# Altium PCB OctopusBotV3R1.PcbDoc
Units mil, origin at the board's own origin, x right, y up, seen from the top; angles counter-clockwise.
Board outline 2109.25 x 3682.09 mil, 2 copper layers (Top Layer, Bottom Layer); 66 components, 69 nets, 273 pads, 70 vias.
Unrouted connection lines stored in the file: 1.
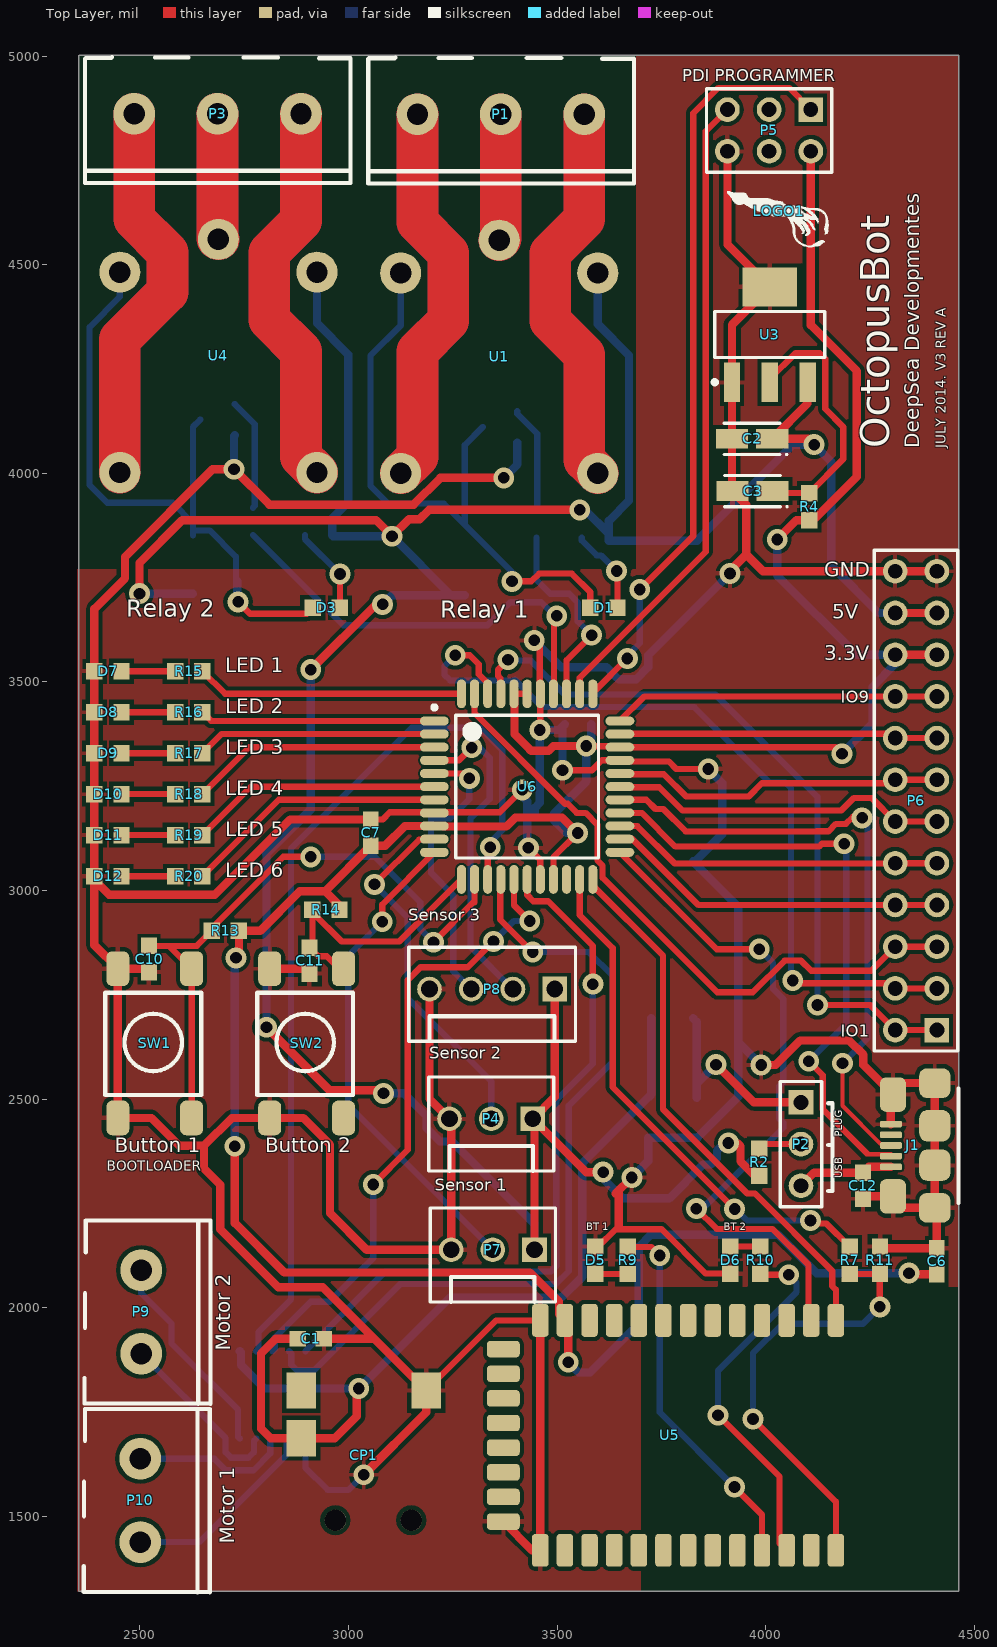
[diagram p0: Top Layer view]
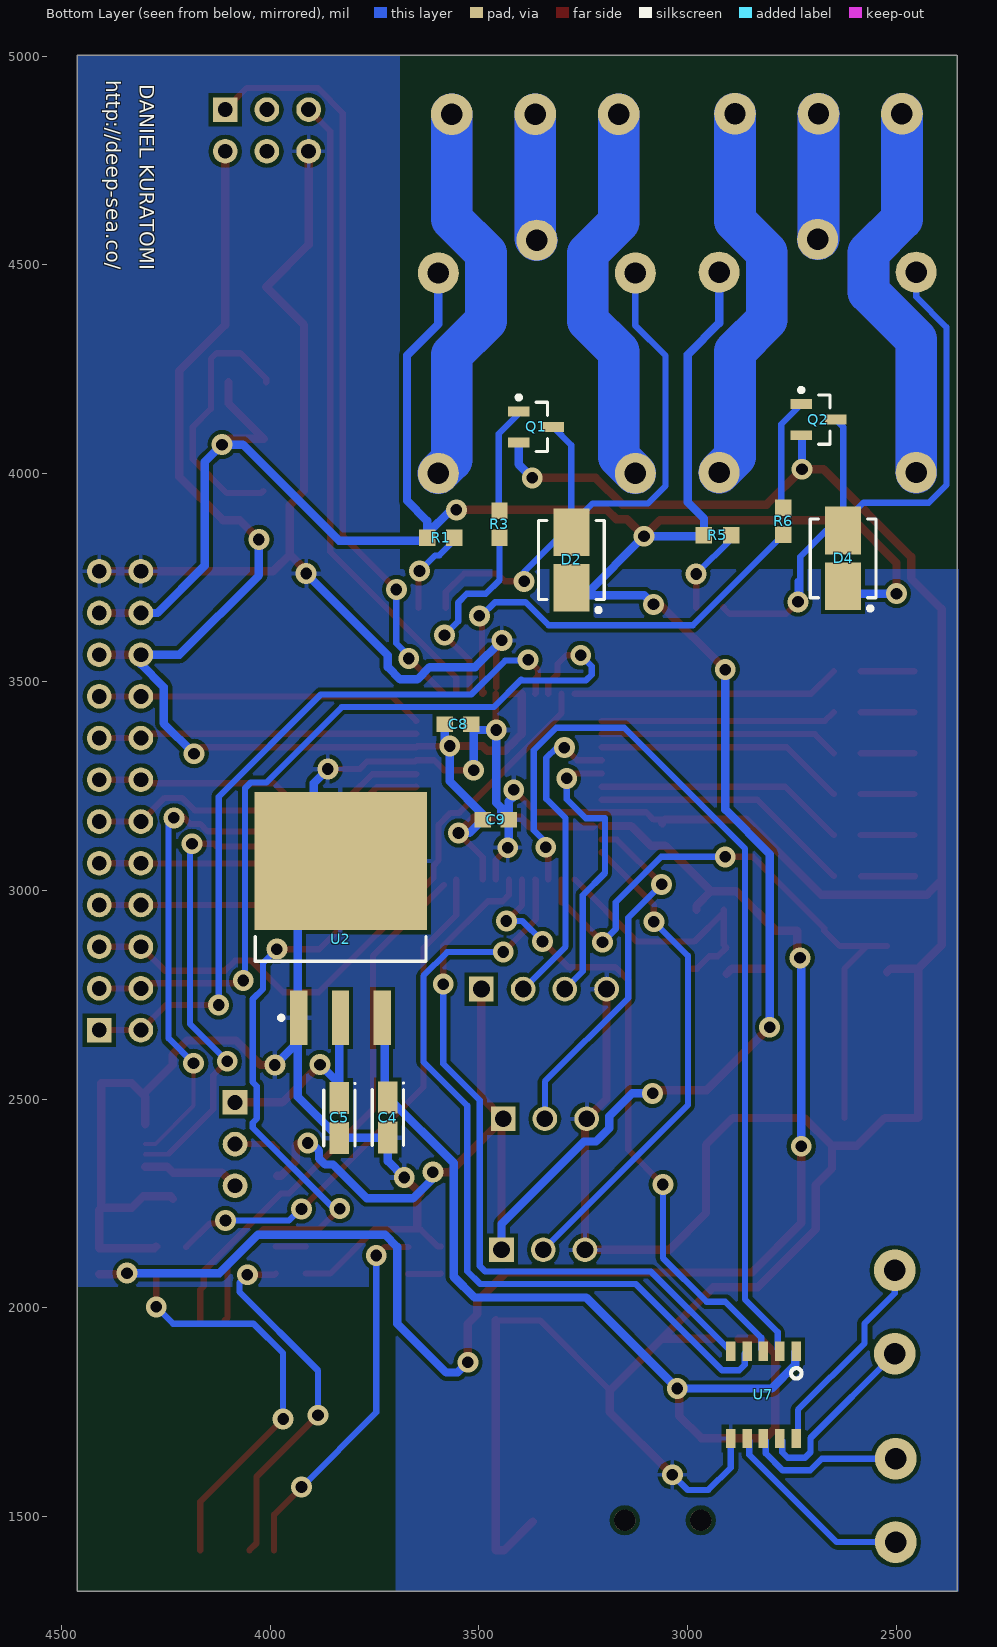
[diagram p1: Bottom Layer view, seen from below]

## Layer stack, top to bottom
Top Layer: signal copper 1.4
Dielectric: dielectric 12.6, FR-4, Dk 4.8
Bottom Layer: signal copper 1.4

## Board outline
2353.35,5000.98 2354.33,5001.97 4462.6,5001.97 4462.6,1319.88 2353.35,1319.88 2353.35,5000.98

## Design rules (kind name [scope] priority, off if disabled: settings)
Clearance fine_pitch [(InComponent('J1') OR InComponent('U6'))] p1: gap=5
Clearance [All] p2: gap=10
MinimumSolderMaskSliver [All] p1: minsoldermaskwidth=5
PolygonConnect [All] p1: connectstyle=Relief reliefconductorwidth=10 reliefentries=4 polygonreliefangle="90 Angle" airgapwidth=10
RoutingVias [All] p1: holewidth=28 width=50 viastyle="Through Hole" minholewidth=28 minwidth=50 maxholewidth=28 maxwidth=50
SilkToSilkClearance [All] p1: silktosilkclearance=2
SilkToSolderMaskClearance Fine [(InComponent('J1') OR InComponent('U6')) vs (InComponent('J1') OR InComponent('U6'))] p1: minsilkscreentomaskgap=1 clearancetoexposedcopper=TRUE
SilkToSolderMaskClearance [IsPad] p2: minsilkscreentomaskgap=5 clearancetoexposedcopper=TRUE
SolderMaskExpansion SolderMaskExpansion_1 [IsVia] p1: expansion=-25
SolderMaskExpansion [All] p2: expansion=4
Width Relays [(InNet('NO_CLOSE_1') OR InNet('NO_CLOSE_2') OR InNet('NO_OPEN_1') OR InNet('NO_OPEN_2') OR InNet('COM_REL_1') OR InNet('COM_REL_2'))] p1: maxlimit=300 minlimit=100 preferedwidth=200
Width Power [(InNet('3V3') OR InNet('5V0') OR InNet('5V0REG') OR InNet('V_POWER') OR InNet('V_USB') OR InNet('GND'))] p2: maxlimit=35 minlimit=15 preferedwidth=20
Width [All] p3: maxlimit=20 minlimit=10 preferedwidth=15
25 further rules are at their usual default settings.

## Components (designator, comment, footprint, x,y, rotation, side; value= is the part's Value field where it differs from the comment)
C1 "0.1uF" C0603_N 2909.45,1925.2 r180 top
C2 "10uF" C_TANT_A_3216_N 3967.52,4082.68 r180 top
C3 "10uF" C_TANT_A_3216_N 3968.5,3957.68 r180 top
C4 "10uF" C_TANT_A_3216_N 3718.5,2455.71 r270 bottom
C5 "10uF" C_TANT_A_3216_N 3834.65,2454.72 r270 bottom
C6 "0.1uF" C0603_N 4410.43,2111.22 r270 top
C7 "0.1uF" C0603_N 3053.15,3138.78 r270 top
C8 "0.1uF" C0603_N 3550.2,3398.62 r0 bottom
C9 "0.1uF" C0603_N 3459.65,3169.29 r0 bottom
C10 "0.1uF" C0603_N 2521.65,2835.63 r270 top
C11 "0.1uF" C0603_N 2906.5,2831.69 r270 top
C12 "0.1uF" C0603_N 4233.27,2292.32 r90 top
CP1 "CONNPOWER" CONNPOWER 3186.02,1801.18 r90 top
D1 "Green" R0603_N 3612.2,3678.15 r180 top
D2 "S1BB-13-F" SMB_M 3278.54,3792.32 r270 bottom
D3 "Green" R0603_N 2946.85,3678.15 r180 top
D4 "S1BB-13-F" SMB_M 2626.97,3796.26 r270 bottom
D5 "Green" R0603_N 3591.54,2114.17 r90 top
D6 "Green" R0603_N 3915.35,2114.17 r270 top
D7 "Green" R0603_N 2423.23,3525.78 r180 top
D8 "Green" R0603_N 2423.23,3427.55 r180 top
D9 "Green" R0603_N 2423.23,3329.33 r180 top
D10 "Green" R0603_N 2423.23,3231.1 r180 top
D11 "Green" R0603_N 2423.23,3132.87 r180 top
D12 "Green" R0603_N 2423.23,3034.65 r180 top
J1 "MICRO_USB" USB_MICRO_SMD 4300.2,2388.78 r90 top
LOGO1 "Logo_DeepSea" DeepSea_logo1 4031.5,4628.94 r90 top
P1 "BLOCK_CONNx3" BLOCK_CONNx3 3365.16,4861.22 r180 top
P2 "Header 3" HDR1X3 4084.65,2492.13 r270 top
P3 "BLOCK_CONNx3" BLOCK_CONNx3 2686.02,4862.2 r180 top
P4 "Conn x 3" "conn x 3" 3441.93,2452.76 r180 top
P5 "Header 3X2" HDR2X3 4108.27,4872.05 r180 top
P6 "Header 12X2" HDR2X12 4410.43,2665.35 r90 top
P7 "Conn x 3" "conn x 3" 3445.87,2138.78 r180 top
P8 "Conn x 4" "conn x 4" 3494.09,2763.78 r180 top
P9 "BLOCK_CONNx2" BLOCK_CONNX2 2502.95,1889.76 r270 top
P10 "BLOCK_CONNx2" BLOCK_CONNX2 2500.98,1437.99 r270 top
Q1 "MMBT3904" SOT23_N 3363.19,4111.22 r180 bottom
Q2 "MMBT3904" SOT23_N 2686.02,4128.94 r180 bottom
R1 "1K" R0603_N 3591.54,3845.47 r0 bottom
R2 "0R" R0603_N 3984.25,2348.43 r270 top
R3 "1K" R0603_N 3450.79,3877.95 r90 bottom
R4 "0R" R0603_N 4104.33,3920.28 r90 top
R5 "1K" R0603_N 2928.15,3851.38 r0 bottom
R6 "1K" R0603_N 2770.67,3884.84 r90 bottom
R7 "1K" R0603_N 4201.77,2113.19 r270 top
R9 "1K" R0603_N 3669.29,2113.19 r270 top
R10 "1K" R0603_N 3987.2,2114.17 r90 top
R11 "10K" R0603_N 4273.95,2114.17 r90 top
R13 "1K" R0603_N 2704.72,2903.54 r0 top
R14 "1K" R0603_N 2945.87,2953.74 r0 top
R15 "1K" R0603_N 2617.13,3525.78 r180 top
R16 "1K" R0603_N 2617.13,3427.55 r180 top
R17 "1K" R0603_N 2617.13,3329.33 r180 top
R18 "1K" R0603_N 2617.13,3231.1 r180 top
R19 "1K" R0603_N 2617.13,3132.87 r180 top
R20 "1K" R0603_N 2617.13,3034.65 r180 top
SW1 "SWITCH" swich_foot 2446.85,2454.72 r90 top
SW2 "SWITCH" swich_foot 2811.02,2454.72 r90 top
U1 "G5LE-1-36 DC5" "Relay 5V" 3125,4000 r270 top
U2 "LM1086ISX-5.0/NOPB" TS3B_N 3831.69,2933.07 r90 bottom
U3 "LM1117MPX-3.3/NOPB" MP04A_N 4009.84,4332.68 r90 top
U4 "G5LE-1-36 DC5" "Relay 5V" 2451.77,4001.97 r270 top
U5 "HC-05" HC-05 3390.75,1693.9 r270 top
U6 "ATXMEGA32A4U-AU" 44A_N 3428.15,3249.02 r0 top
U7 "LV8548MC-AH" SOIC10 2739.17,1895.67 r0 bottom

## Footprints (in the part's own frame and the unit in brackets; to place one, negate y for a bottom-side part, rotate by r counter-clockwise, add the part's x,y. Pads: shape width x height; smd on the part's side, far side on the other; paste and mask are expansions set on the pad)
44A_N [mm] "Thin QFP, 44-Leads, Body 10x10mm, Pitch 0.8mm, IPC Medium Density"
  oval 1.75x0.55 smd: 1(-5.65,4) 2(-5.65,3.2) 3(-5.65,2.4) 4(-5.65,1.6) 5(-5.65,0.8) 6(-5.65,0) 7(-5.65,-0.8) 8(-5.65,-1.6) 9(-5.65,-2.4) 10(-5.65,-3.2) 11(-5.65,-4) 23(5.65,-4) 24(5.65,-3.2) 25(5.65,-2.4) 26(5.65,-1.6) 27(5.65,-0.8) 28(5.65,0) 29(5.65,0.8) 30(5.65,1.6) 31(5.65,2.4) 32(5.65,3.2) 33(5.65,4)
  oval 0.55x1.75 smd: 12(-4,-5.65) 13(-3.2,-5.65) 14(-2.4,-5.65) 15(-1.6,-5.65) 16(-0.8,-5.65) 17(0,-5.65) 18(0.8,-5.65) 19(1.6,-5.65) 20(2.4,-5.65) 21(3.2,-5.65) 22(4,-5.65) 34(4,5.65) 35(3.2,5.65) 36(2.4,5.65) 37(1.6,5.65) 38(0.8,5.65) 39(0,5.65) 40(-0.8,5.65) 41(-1.6,5.65) 42(-2.4,5.65) 43(-3.2,5.65) 44(-4,5.65)
  silkscreen extent -5.77,-4.35 4.35,4.95, body extent -5,-5 5,5, height 1.2
BLOCK_CONNX2 [mm]
  round 2.54 hole 1.3: 1(-5.08,0) 2(0,0)
  silkscreen extent -8.1,-3.45 3.08,4.23, body extent -8.1,-3.45 3.05,4.23, height 10
BLOCK_CONNx3 [mm]
  round 2.54 hole 1.3: 1(-5.08,0) 2(0,0) 3(5.08,0)
  silkscreen extent -8.1,-3.45 8.08,4.23, body extent -8.1,-3.4 8.1,4.2, height 10
C0603_N [mm] "Chip Capacitor, 2-Leads, Body 1,60x0,80mm, IPC Medium Density"
  rect 1x0.95 smd: 1(-0.8,0) 2(0.8,0)
  body extent -0.88,-0.48 0.87,0.48, height 0.85
C_TANT_A_3216_N [mm] "Molded Capacitor, 2-Leads, Body 3,20x1,60mm, IPC Medium Density"
  rect 1.95x1.2 smd: 1(-1.225,0) 2(1.225,0)
  silkscreen extent -2.15,-0.95 1.7,1, body extent -1.7,-0.9 1.7,0.9, height 1.8
"conn x 3" [mm]
  rect 1.5x1.5 hole 1.016: 1(0,0)
  round 1.5 hole 1.016: 2(2.54,0) 3(5.08,0)
  silkscreen extent -1.27,-2.54 6.35,3.18
"conn x 4" [mm]
  rect 1.5x1.5 hole 1.016: 1(0,0)
  round 1.5 hole 1.016: 2(2.54,0) 3(5.08,0) 4(7.62,0)
  silkscreen extent -1.27,-2.54 8.89,3.18
CONNPOWER [mm]
  rect 2.2x1.8 smd: 1(0,0) 2(-2.9,7.6) 3(0,7.6)
  round 1.3 hole 1.3: ""(-7.9,0.9) ""(-7.9,5.525)
  body extent -11.53,-0.8 1.15,7.65, height 6
DeepSea_logo1 [mil]
  silkscreen extent -87,-120 47,123
HC-05 [mm]
  rrect40% 2x1 smd: 1(-7,19.75) 2(-7,18.25) 3(-7,16.75) 4(-7,15.25) 5(-7,13.75) 6(-7,12.25) 7(-7,10.75) 8(-7,9.25) 9(-7,7.75) 10(-7,6.25) 11(-7,4.75) 12(-7,3.25) 13(-7,1.75) 22(7,1.75) 23(7,3.25) 24(7,4.75) 25(7,6.25) 26(7,7.75) 27(7,9.25) 28(7,10.75) 29(7,12.25) 30(7,13.75) 31(7,15.25) 32(7,16.75) 33(7,18.25) 34(7,19.75)
  rrect40% 1x2 smd: 14(-5.25,-0.5) 15(-3.75,-0.5) 16(-2.25,-0.5) 17(-0.75,-0.5) 18(0.75,-0.5) 19(2.25,-0.5) 20(3.75,-0.5) 21(5.25,-0.5)
  body extent -6.42,-0.05 6.58,26.85, height 2.4
HDR1X3 [mm] "Connector; Header; 3 Position"
  rect 1.5x1.5 hole 0.9: 1(0,0)
  round 1.5 hole 0.9: 2(2.54,0) 3(5.08,0)
  silkscreen extent -1.27,-1.27 6.35,1.27
HDR2X3 [mm] "Connector; Header; 3x2 Position"
  rect 1.5x1.5 hole 0.9: 1(0,0)
  round 1.5 hole 0.9: 2(0,2.54) 3(2.54,0) 4(2.54,2.54) 5(5.08,0) 6(5.08,2.54)
  silkscreen extent -1.27,-1.27 6.35,3.81
HDR2X12 [mm] "Connector; Header; 12x2 Position"
  rect 1.5x1.5 hole 0.9: 1(0,0)
  round 1.5 hole 0.9: 2(0,2.54) 3(2.54,0) 4(2.54,2.54) 5(5.08,0) 6(5.08,2.54) 7(7.62,0) 8(7.62,2.54) 9(10.16,0) 10(10.16,2.54) 11(12.7,0) 12(12.7,2.54) 13(15.24,0) 14(15.24,2.54) 15(17.78,0) 16(17.78,2.54) 17(20.32,0) 18(20.32,2.54) 19(22.86,0) 20(22.86,2.54) 21(25.4,0) 22(25.4,2.54) 23(27.94,0) 24(27.94,2.54)
  silkscreen extent -1.27,-1.27 29.21,3.81
MP04A_N [mm] "SOT223, 4-Leads, Body 6.5x3.5mm, Pitch 2.3mm, Lead Span 7mm, IPC Medium Density"
  rect 2.4x1 smd: 1(-2.9,2.3) 2(-2.9,0) 3(-2.9,-2.3)
  rect 2.4x3.3 smd: 4(2.9,0)
  silkscreen extent -3.02,-3.35 1.4,3.47, body extent -1.85,-3.35 1.85,3.35, height 1.8
R0603_N [mm] "Chip Resistor, 2-Leads, Body 1,60x0,85mm, IPC Medium Density"
  rect 1x1 smd: 1(-0.825,0) 2(0.825,0)
  body extent -0.87,-0.48 0.87,0.47, height 0.45
"Relay 5V" [mm]
  round 2.5 hole 1.3: 1(-14.2,6) 2(-12.2,12) 3(0,12) 4(0,0) 5(-12.2,0)
  body extent -16.75,-2.25 5.75,14.25, height 20
SMB_M [mm] "Molded Diode, 2-Leads, Body 4,41x3,62mm, IPC Low Density"
  rect 2.9x2.2 smd: 1(-1.7,0) 2(1.7,0)
  silkscreen extent -2.4,-2 3.17,2, body extent -2.37,-1.97 2.38,1.97, height 2.42
SOIC10 [mm]
  rect 0.58x1.18 smd: 1(0,0) 2(1,0) 3(2,0) 4(3,0) 5(4,0) 6(4,5.32) 7(3,5.32) 8(2,5.32) 9(1,5.32) 10(0,5.32)
  silkscreen extent -0.32,1.03 0.32,1.67, body extent -0.55,0.68 4.45,4.68, height 1.75
SOT23_N [mm] "SOT23, 3-Leads, Body 2.9x1.3mm, Pitch 0.95mm, Lead Span 2.3mm, IPC Medium Density"
  rect 1.3x0.6 smd: 1(-1.05,0.95) 2(-1.05,-0.95) 3(1.05,0)
  silkscreen extent -1.18,-1.5 0.7,1.92, body extent -0.7,-1.5 0.7,1.5, height 1.1
swich_foot [mil]
  rrect50% 83x55 smd: 1(0,0) 1(358,0) 2(0,-177) 2(358,-177)
  silkscreen extent 55,-200 300,30, body extent 57,-201 300,29, height 138
TS3B_N [mm] "D2-PAK, 4-Leads, Body 8.6x10.2mm, Pitch 2.54mm, Lead Span 14.2mm, IPC Medium Density"
  rect 3.3x1.05 smd: 1(-6.05,2.54) 2(-6.05,0) 3(-6.05,-2.54)
  rect 8.4x10.5 smd: 4(3.5,0)
  silkscreen extent -6.17,-5.2 -1.1,5.2, body extent -2.6,-5.2 6.29,5.2, height 4.64
USB_MICRO_SMD [mm]
  rrect50% 0.4x1.35 smd: 1(-1.3,0) 2(-0.65,0) 3(0,0) 4(0.65,0) 5(1.3,0)
  rrect50% 1.8x1.9 smd: shd(-3.8,-2.67) shd(3.8,-2.675)
  rrect50% 2.1x1.6 smd: shd(-3.1,-0.125) shd(3.1,-0.125)
  rrect50% 1.9x1.9 smd: shd(-1.2,-2.675) shd(1.2,-2.675)
  silkscreen extent -3.5,-4.13 3.47,-4.13, body extent -3.96,-5.1 4.01,0.33, height 2.68

## Part data
C1 C6 C7 C8 C9 C10 C11 C12: library part C_SMD
C2 C3 C4 C5: library part CP_SMD
D1 D3 D5 D6 D7 D8 D9 D10 D11 D12: library part LED_SMD
D2 D4: "DIODE GEN PURPOSE 100V 1A SMB"
J1: "CONN USB MICRO B RECPT SMT R/A"
P1 P3: "TERM BLOCK 5.08MM VERT 3POS PCB"
P2: "Header, 3-Pin"
P4 P7: "CONN HEADER VERT 3POS .100 TIN"
P5: "Header, 3-Pin, Dual row"
P6: "Header, 12-Pin, Dual row"
P8: "CONN HEADER VERT 4POS .100 TIN"
P9 P10: "TERM BLOCK 5.08MM VERT 2POS PCB"
Q1 Q2: "NPN Switching Transistor"
R1 R2 R3 R4 R5 R6 R7 R9 R10 R11 R13 R14 R15 R16 R17 R18 R19 R20: library part R_SMD
SW1 SW2: "SWITCH TACTILE SPST-NO 0.05A 12V"
U1 U4: "RELAY GEN PURPOSE SPDT 10A 5V"
U2: "1.5A Low Dropout Positive Regulators, 3-pin TO-263, Pb-Free"
U3: "800mA Low-Dropout Linear Regulator, 4-pin SOT-223, Pb-Free"
U5: "Bluetooth RS232 module"
U6: "IC MCU 8BIT 32KB FLASH 44TQFP"
U7: "IC MOTOR DRIVER PAR MFP10S"

## Via types
v1: diameter 50, hole 28, Top Layer to Bottom Layer, 70 vias

## Nets (pads, with @x,y where several pads share a name; then routed paths per layer and width w, separated by ;. In a path a pad name is that pad's centre, name@x,y a point inside that pad or via, vN(x,y) a via of type N, cw(c..) or ccw(c..) an arc to the next point about the centre after c; other vN are vias at no path point)
3V3: C6.2 C7.2 C8.2 C9.2 P5.2 P6.19 P6.20 R4.1 R13.2 R14.2 U5.12 U6.9 U6.19 U6.31 U6.39 U6.40 | length 7203.6
  Top Layer w15: U6.9@3205.22,3152.03 U6.9@3205.71,3152.52 ; U6.40 3397.66,3471.46 U6.39@3427.15,3471.46 ; U6.19 3491.14,3079.72 v1(3549.21,3137.8) ; v1(3569.88,3346.46) 3570.33,3346 3648.09,3346 U6.31 4167.58,3343.5 v1(4183.07,3328.01)
  Top Layer w20: v1(2727.36,2386.81) 2727.36,2202.76 2845.87,2084.25 3434.68,2084.25 3504.33,2014.6 3504.33,1983.86 U5.12 3526.57,1961.61 v1(3526.57,1869.09) ; v1(2730.32,2838.58) 2737.2,2845.47 R13.2 2788.46,2903.54 2883.35,2998.43 2943.43,2998.43 ; R14.2 2978.35,2963.51 2943.43,2998.43 ; U6.9 3134.84,3154.53 3087.6,3107.28 C7.2 2944.29,2998.43 2943.43,2998.43 ; U6.9@3227.36,3153.54 3378.25,3153.54 3399.9,3175.2 3511.81,3175.2 v1(3549.21,3137.8) ; U6.40@3397.66,3471.46 3397.66,3374.98 3426.18,3346.46 3426.34,3346.46 3437.95,3334.84 3479.37,3334.84 3490.99,3346.46 v1(3569.88,3346.46) ; U6.39@3427.15,3471.46 U6.39 ; v1(4027.56,3841.54) 4073.82,3887.8 R4.1 4114.1,3887.8 4218.52,3992.22 4218.52,4245.08 4108.27,4355.34 P5.2 ; P6.20 P6.19 ; v1(4343.5,2082.68) 4346.46,2079.72 C6.2
  Bottom Layer w20: v1(2727.36,2386.81) 2727.36,2835.63 v1(2730.32,2838.58) ; v1(3526.57,1869.09) 3551.18,1844.49 3578.74,1844.49 3696.06,1961.81 3696.06,2145.71 3725.35,2175 4029.57,2175 4121.89,2082.68 v1(4343.5,2082.68) ; v1(3549.21,3137.8) 3522.64,3137.8 C9.2 3491.14,3182.79 3569.88,3261.53 v1(3569.88,3346.46) 3581.69,3358.27 C8.2 ; v1(4027.56,3841.54) 4027.56,3755.51 4217.72,3565.35 P6.20 4310.43,3542.47 4255.91,3487.94 4255.91,3400.85 v1(4183.07,3328.01)
5V0: C2.1 D2.2 D4.2 P4.1 P6.21 P6.22 P7.1 P8.1 R1.2 R2.2 R5.2 U1.2 U3.3 U4.2 | length 8277
  Top Layer w20: v1(2499.02,3711.61) 2499.02,3785.43 2601.38,3887.8 3065.94,3887.8 v1(3104.33,3849.41) 3144.92,3890 3170.56,3890 3192.97,3912.4 v1(3554.13,3912.4) ; v1(2803.15,2672.24) 2954.17,2521.22 3076.22,2521.22 v1(3083.66,2513.78) ; v1(2909.45,3529.53) 3065.94,3686.02 v1(3081.69,3686.02) ; P7.1 P4.1@3445.87,2448.82 ; P8.1 3494.09,2504.92 P4.1 P4.1@3445.87,2448.82 ; v1(3610.41,2324.92) 3569.77,2324.92 P4.1@3445.87,2448.82 ; v1(3910.43,2394.68) 3932.09,2394.68 3939.57,2387.2 3939.57,2350.86 3974.49,2315.94 R2.2 ; U3.3 4100.39,4167.32 C2.1 4102.36,4082.68 v1(4116.14,4068.9) ; P6.22 P6.21
  Bottom Layer w20: v1(2499.02,3711.61) D4.2@2626.97,3711.61 ; v1(2803.15,2672.24) 2803.15,3085.58 2802.17,3086.56 2909.45,3193.85 v1(2909.45,3529.53) ; U4.2 2924.21,4359.92 2999.21,4284.92 2999.21,3930.51 2960.63,3891.93 R5.2 2962.6,3849.41 v1(3104.33,3849.41) D2.2@3246.06,3707.68 ; v1(3081.69,3686.02) 3103.35,3707.68 D2.2@3246.06,3707.68 ; v1(3083.66,2513.78) 3132.87,2513.78 3187.4,2459.25 3187.4,2430.17 3219.34,2398.23 3248.43,2398.23 3445.87,2200.79 P7.1 ; D2.2@3278.54,3707.68 D2.2@3246.06,3707.68 ; v1(3554.13,3912.4) 3566.85,3912.4 R1.2@3624.02,3855.24 ; U1.2 3597.44,4357.96 3672.44,4282.96 3672.44,3934.45 3624.02,3886.02 3624.02,3838.58 3835.63,3838.58 4065.94,4068.9 v1(4116.14,4068.9) 4157.48,4027.56 4157.48,3778.54 4270.67,3665.35 P6.22 ; v1(3610.41,2324.92) 3610.41,2310.02 3658.42,2262.01 3768.9,2262.01 3850,2343.11 3868.62,2343.11 3883.27,2357.75 3883.27,2376.38 3901.57,2394.68 v1(3910.43,2394.68)
5V0REG: C5.1 P2.1 U2.2 | length 501.3
  Top Layer w20: v1(3880.91,2582.68) 3971.46,2492.13 P2.1
  Bottom Layer w20: U2.2@3825.79,2693.9 3834.65,2685.04 C5.1@3834.65,2536.42 ; C5.1 C5.1@3834.65,2536.42 ; v1(3880.91,2582.68) C5.1@3834.65,2536.42
BRD_1: U6.14 U7.2 | length 2212.4
  Top Layer w15: U6.14 3333.66,3097.38 v1(3339.82,3103.54)
  Bottom Layer w15: U7.2 2784,1901.12 2784,1941.4 2861.95,2019.35 2861.95,3100.38 3151.58,3390.02 3314.95,3390.02 3368.58,3336.39 3368.58,3144.17 3339.82,3115.41 v1(3339.82,3103.54)
BRD_2: U6.16 U7.3 | length 1522.7
  Top Layer w15: v1(3059.06,2295.28) 3142.07,2378.29 3142.07,2785.33 3172.54,2815.81 3285.3,2815.81 v1(3347.44,2877.95) ; U6.16 3396.65,2964.57 v1(3434.31,2926.91)
  Bottom Layer w15: U7.3 2823.37,1901.12 2823.37,1928.22 2909.45,2014.3 2954.26,2014.3 3059.06,2119.09 v1(3059.06,2295.28) ; v1(3347.44,2877.95) 3396.4,2926.91 v1(3434.31,2926.91) v1@3434.31,2933.33
BRD_3: U6.15 U7.4 | length 1977.4
  Top Layer w15: U6.15 3363.66,3025.08 3363.66,2930.38 v1(3441.59,2852.45)
  Bottom Layer w15: U7.4 2862.74,1890.22 2862.74,1863.12 2875.92,1849.94 2917.39,1849.94 3124.2,2056.75 3497.14,2056.75 3527.89,2087.51 3527.89,2484.48 3633.13,2589.72 3633.13,2795.27 3575.94,2852.45 v1(3441.59,2852.45)
BRD_4: U6.17 U7.5 | length 1734.8
  Top Layer w15: U6.17 3428.15,2989.17 3442.91,2974.41 3478.35,2974.41 3585.63,2867.13 v1(3585.63,2775.59)
  Bottom Layer w15: U7.5 3087.74,2086.75 3484.71,2086.75 3497.89,2099.93 3497.89,2496.91 3585.63,2584.65 v1(3585.63,2775.59)
BT_KEY: R7.1 U6.21 | length 1257.9
  Top Layer w15: U6.21 3554.13,2941.05 3633.13,2862.05 3633.13,2528.7 v1(3925.49,2236.34) ; v1(4107.48,2208.77) 4114.48,2201.77 4145.67,2201.77 R7.1
  Bottom Layer w15: v1(3925.49,2236.34) 3928.03,2236.34 3955.6,2208.77 v1(4107.48,2208.77)
BT_RX: U5.1 U6.22 | length 1296.5
  Top Layer w15: U6.22@3584.13,3013.2 3753.94,2843.4 3753.94,2475.07 3955.25,2273.76 3973.71,2273.76 4159.59,2087.89 4159.59,2051.7 4168.31,2042.98 U5.1
BT_TX: U5.2 U6.23 | length 1639.1
  Top Layer w15: U6.23 3882.73,2859.39 v1(3984.45,2859.39) ; v1(3833.85,2237.31) 3882.32,2188.84 4016.21,2188.84 4102.62,2102.43 4102.62,1976.12 U5.2
  Bottom Layer w15: v1(3833.85,2237.31) 3836.69,2240.16 3850.91,2240.16 4042.32,2431.57 4042.32,2443.57 4032.62,2453.28 4032.62,2530.97 4042.32,2540.68 4042.32,2739.91 4017.46,2764.77 4017.46,2826.38 v1(3984.45,2859.39)
COM_REL_1: P1.2 U1.1 | length 607.6
  Top Layer w100: U1.1 3365.16,4562.99 P1.2
  Bottom Layer w100: U1.1 3365.16,4562.99 P1.2
COM_REL_2: P3.2 U4.1 | length 604
  Top Layer w100: P3.2 2686.02,4562.99 U4.1
  Bottom Layer w100: P3.2 2686.02,4562.99 U4.1
CTRL_RELAY_1: R3.1 U6.36 | length 496.1
  Top Layer w15: U6.36 3522.64,3552.17 v1(3582.68,3612.2)
  Bottom Layer w15: R3.1 3450.79,3744.09 3483.76,3711.12 3529.04,3711.12 3549.7,3690.45 3549.7,3645.18 v1(3582.68,3612.2) 3577.76,3612.2 v1@3569.88,3620.08
CTRL_RELAY_2: R6.1 U6.37 | length 1048.7
  Top Layer w15: U6.37@3488.19,3474.41 U6.37 3492.64,3472.95 3492.64,3652.09 v1(3499.02,3658.46)
  Bottom Layer w15: R6.1 2987.07,3635.96 3333.14,3635.96 3388.12,3690.94 3461.51,3690.94 3493.99,3658.46 v1(3499.02,3658.46)
GND: C1.1 C2.2 C3.2 C4.2 C5.2 C6.1 C7.1 C8.1 C9.1 C10.2 C11.2 C12.1 CP1.1 D5.2 D6.2 D7.2 D8.2 D9.2 D10.2 D11.2 D12.2 J1.5 J1.shd P4.3 P5.6 P6.23 P6.24 P7.3 P8.4 Q1.2 Q2.2 R11.2 SW1.1 SW2.1 U2.1 U2.4 U3.1 U3.4 U5.13 U5.21 U5.22 U6.8 U6.18 U6.30 U6.38 U7.6 | length 14788.4
  Top Layer w15: C7.1 3081.69,3170.28 3098.94,3187.52 3362.73,3187.52 v1(3416.51,3241.3) ; CP1.1 3186.02,1801.81 3353.7,1969.49 U5.13 ; v1(3431.1,3102.36) 3459.65,3073.82 U6.18 ; v1(3445.05,3599.59) 3458.46,3586.17 U6.38@3458.46,3487.11 ; v1(3458.66,3384.84) 3459.65,3385.83 U6.38 ; v1(3512.8,3288.39) 3583.68,3288.39 3607.3,3312.01 U6.30 ; D5.2 3599.09,2146.65 3640.29,2187.85 3750.38,2187.85 3856.55,2081.69 D6.2 ; U6.30@3650.59,3311 3652.09,3309.51 3767.57,3309.51 3785.74,3291.34 v1(3862.2,3291.34)
  Top Layer w20: C10.2 2513.06,2812.72 SW1.1@2446.85,2812.72 ; SW2.1@2811.02,2812.72 2893.97,2812.72 C11.2 ; C1.1 3062.01,1925.2 ; v1(3036.42,1599.41) 3186.02,1749.02 CP1.1 3062.01,1925.2 ; C7.1 2859.96,3170.28 2679.65,2989.96 2425.67,2989.96 D12.2@2390.75,3024.88 ; C7.1@3060.04,3161.42 C7.1@3061.02,3162.4 ; P8.4 3194.09,2500.59 P4.3 3245.87,2448.82 P7.3 3043.31,2138.78 2955.71,2226.38 2955.71,2390.74 2891.72,2454.72 2811.02,2454.72 2720.15,2454.72 2653.65,2388.22 ; U5.21 3439.96,1418.31 U5.22 U5.13 ; v1(3372.05,3989.17) 3220.24,3989.17 3156.07,3925 2810.24,3925 v1(2725.39,4009.84) 2673.93,4009.84 2464.02,3799.93 2464.02,3748.46 2390.75,3675.2 D7.2 D8.2 D9.2 D10.2 D11.2 D12.2 D12.2@2390.75,3024.88 ; 3640.29,2273.16 v1(3679.13,2312.01) ; 3647.64,2191.93 3647.64,2277.24 ; P5.6 3908.27,4548.43 U3.4 3919.29,4356.3 U3.1 C2.2 3919.29,3958.66 C3.2 3953.35,3924.61 3953.35,3805.51 ; v1(3914.37,3759.84) 3914.37,3766.54 3953.35,3805.51 ; v1(3989.17,2581.69) 4023.78,2581.69 4082.64,2640.55 4200.17,2640.55 4234.26,2606.47 4234.26,2581.69 J1.shd@4305.12,2510.83 ; C12.1 4239.17,2266.73 4305.12,2266.73 4332.68,2239.17 J1.shd@4405.31,2239.17 ; R11.2 4277.89,2142.72 C6.1 4410.43,2234.06 J1.shd@4405.31,2239.17 ; J1.5 4300.2,2505.91 J1.shd@4305.12,2510.83 ; P6.23 P6.24 3993.5,3765.35 3953.35,3805.51 ; D12.2@2390.75,3024.88 2390.75,2868.83 SW1.1@2446.85,2812.72 ; SW1.1@2446.85,2812.72 2446.85,2454.72 2527.55,2454.72 2594.05,2388.22 2653.65,2388.22 ; 2653.65,2388.22 2653.65,2333.55 2692.36,2294.84 2692.36,2188.26 2831.37,2049.25 2937.95,2049.25 3062.01,1925.2 ; J1.shd@4305.12,2510.83 4332.68,2538.39 4405.51,2538.39 4405.51,2436.02 4405.51,2341.54 4405.31,2341.34 J1.shd@4405.31,2239.17
  Bottom Layer w15: U7.6 2896.65,1616.14 2949.8,1562.99 3000,1562.99 v1(3036.42,1599.41)
  Bottom Layer w20: v1(2725.39,4009.84) 2725.39,4089.57 Q2.2 ; v1(3372.05,3989.17) 3404.53,4021.65 Q1.2 ; v1(3416.51,3241.3) 3416.51,3225.72 3428.15,3214.07 C9.1 ; v1(3431.1,3102.36) 3428.15,3105.32 C9.1 ; v1(3445.05,3599.59) 3509.24,3535.39 3618.31,3535.39 3647.6,3506.1 3689.02,3506.1 3718.31,3535.39 3718.31,3563.78 v1(3914.37,3759.84) ; v1(3512.8,3288.39) C8.1@3512.8,3392.72 ; C8.1 C8.1@3512.8,3392.72 ; v1(3679.13,2312.01) 3718.5,2351.38 C4.2 3833.66,2407.48 C5.2 3835.55,2406.5 3934.06,2505 U2.1@3934.06,2636.81 ; U2.4@3825.79,3069.88 3934.06,2961.61 U2.1@3934.06,2636.81 ; U2.4 3895.67,3134.84 3895.67,3257.87 v1(3862.2,3291.34) ; v1(3989.17,2581.69) U2.1@3934.06,2636.81 ; C9.1 3446.46,3187.6 3446.46,3198.35 3458.66,3210.55 v1(3458.66,3384.84) 3504.92,3384.84 C8.1@3512.8,3392.72
LED1: R15.1 U6.44 | length 643.6
  Top Layer w15: R15.1 2703.93,3471.46 U6.44
LED2: R16.1 U6.1 | length 564.8
  Top Layer w15: R16.1 2670.66,3406.5 U6.1
LED3: R17.1 U6.2 | length 575
  Top Layer w15: R17.1 2695.28,3375 U6.2
LED4: R18.1 U6.3 | length 602.7
  Top Layer w15: R18.1 2762.01,3343.5 U6.3
LED5: R19.1 U6.6 | length 604.2
  Top Layer w15: R19.1 2765.75,3249.02 U6.6
LED6: R20.1 U6.7 | length 631.9
  Top Layer w15: R20.1 2832.48,3217.52 U6.7
M1_A: P9.1 U7.10 | length 501.4
  Bottom Layer w15: P9.1 2502.95,2034.76 2575.45,1962.26 2575.45,1914.7 2735.26,1754.9 2735.26,1690.14 U7.10
M1_B: P9.2 U7.9 | length 433.4
  Bottom Layer w15: P9.2 2705.26,1687.46 2705.26,1653.67 2718.44,1640.49 2759.91,1640.49 2773.09,1653.67 2773.09,1680.77 U7.9
M2_A: P10.1 U7.8 | length 377.4
  Bottom Layer w15: P10.1 2678.51,1637.99 2706.01,1610.49 2772.34,1610.49 2812.46,1650.62 2812.46,1680.77 U7.8
M2_B: P10.2 U7.7 | length 478.6
  Bottom Layer w15: P10.2 2642.26,1437.99 2851.83,1647.56 2851.83,1680.77 U7.7
NetC3_1: C3.1 R4.2 U3.2 | length 635.7
  Top Layer w15: U3.2 4009.84,4226.7 4071.39,4288.25 4129.4,4288.25 4142.58,4275.07 4142.58,4154.67 4186.02,4111.22 4186.02,4034.45 R4.2 4021.65,3952.76 C3.1
NetD1_1: D1.1 R1.1 | length 208.7
  Top Layer w15: v1(3642.72,3765.75) 3644.68,3763.78 D1.1
  Bottom Layer w15: R1.1 3559.06,3839.24 3595.01,3803.29 3605.18,3803.29 v1(3642.72,3765.75)
NetD1_2: D1.2 D2.1 Q1.3 U1.5 | length 1538
  Top Layer w15: v1(3391.73,3741.14) 3437.99,3741.14 3456.69,3759.84 3535.43,3759.84 3579.72,3715.55 D1.2
  Bottom Layer w15: U1.5 3125,4354.42 3052.5,4281.92 3052.5,3969.97 3094.97,3927.5 3228.01,3927.5 D2.1@3278.54,3876.97 ; Q1.3 3278.54,4067.91 D2.1@3278.54,3876.97 ; v1@3394.68,3741.14 3378.94,3741.14 3391.73,3728.35 v1(3391.73,3741.14) 3391.73,3763.78 D2.1@3278.54,3876.97
NetD3_1: D3.1 R5.1 | length 207.9
  Top Layer w15: D3.1 v1(2979.33,3758.86)
  Bottom Layer w15: R5.1 2895.67,3842.52 v1(2979.33,3758.86)
NetD3_2: D3.2 D4.1 Q2.3 U4.5 | length 1610.8
  Top Layer w15: v1(2735.24,3691.93) 2763.78,3663.39 2899.61,3663.39 D3.2 D3.2@2913.39,3679.13 ; v1@2736.22,3681.1 v1@2738.19,3679.13
  Bottom Layer w15: U4.5 2451.77,4423.29 2379.27,4350.79 2379.27,3971.94 2421.74,3929.47 2578.41,3929.47 D4.1@2626.97,3880.91 ; D4.1@2626.97,3851.1 D4.1 ; Q2.3 2626.97,4111.22 D4.1@2626.97,3880.91 ; D4.1 2666.81,3863.19 2730,3800 2730,3748.07 ; D4.1 D4.1@2626.97,3880.91 ; 2730,3748.07 2736.22,3741.85 2736.22,3692.91 v1(2735.24,3691.93) 2730,3697.17 2730,3748.07
NetD5_1: D5.1 R9.2 | length 78.2
  Top Layer w15: D5.1 3592.52,2080.71 R9.2
NetD6_1: D6.1 R10.2 | length 71.9
  Top Layer w15: D6.1 R10.2
NetD7_1: D7.1 R15.2 | length 128.9
  Top Layer w15: D7.1 R15.2
NetD8_1: D8.1 R16.2 | length 128.9
  Top Layer w15: D8.1 R16.2
NetD9_1: D9.1 R17.2 | length 128.9
  Top Layer w15: D9.1 R17.2
NetD10_1: D10.1 R18.2 | length 128.9
  Top Layer w15: D10.1 R18.2
NetD11_1: D11.1 R19.2 | length 128.9
  Top Layer w15: D11.1 R19.2
NetD12_1: D12.1 R20.2 | length 128.9
  Top Layer w15: D12.1@2454.72,3033.96 R20.2@2583.66,3033.96
NetP2_2: P2.2 R2.1 | length 105
  Top Layer w15: R2.1 3995.47,2392.13 P2.2
NetQ1_1: Q1.1 R3.2 | length 258.9
  Bottom Layer w15: Q1.1 3404.53,4143.04 3452.62,4094.95 3452.62,3912.26 R3.2
NetQ2_1: Q2.1 R6.2 | length 270.9
  Bottom Layer w15: Q2.1 2727.36,4165.54 2775.45,4117.45 2775.45,3922.11 R6.2
NetR7_2: R7.2 R11.1 U5.34 | length 1056.9
  Top Layer w15: v1(3969.49,1733.27) 4168.31,1534.45 U5.34 ; R7.2 4272.97,2080.71 R11.1@4273.62,2081.37 ; v1(4273.62,2001.97) R11.1@4273.62,2081.37 ; R11.1 R11.1@4273.62,2081.37
  Bottom Layer w15: v1(3969.49,1733.27) 3969.49,1890.64 4040.46,1961.61 4233.27,1961.61 v1(4273.62,2001.97)
NetR9_1: R9.1 U5.31 | length 893.5
  Top Layer w15: R9.1 3725.39,2145.67 v1(3746.06,2125) ; v1(3925.2,1569.88) 3991.14,1503.94 U5.31
  Bottom Layer w15: v1(3746.06,2125) 3746.06,1749.02 v1(3925.2,1569.88)
NetR10_1: R10.1 U5.32 | length 883.3
  Top Layer w15: v1(3885.83,1742.13) 4033.33,1594.63 4033.33,1435.18 U5.32 ; R10.1 3990.16,2078.74 v1(4055.12,2078.74)
  Bottom Layer w15: v1(3885.83,1742.13) 3885.83,1849.41 4073.82,2037.4 4073.82,2060.04 v1(4055.12,2078.74)
NO_CLOSE_1: P1.3 U1.4 | length 1878.4
  Top Layer w100: U1.4 3165.16,4040.16 3165.16,4292.05 3239.21,4366.1 3239.21,4527.62 3165.16,4601.68 P1.3
  Bottom Layer w100: U1.4 3165.16,4040.16 3165.16,4292.05 3239.21,4366.1 3239.21,4527.62 3165.16,4601.68 P1.3
NO_CLOSE_2: P3.3 U4.4 | length 1881.3
  Top Layer w100: U4.4 2451.77,4320.76 2565.98,4434.98 2565.98,4529.59 2486.02,4609.55 P3.3
  Bottom Layer w100: U4.4 2451.77,4320.76 2565.98,4434.98 2565.98,4529.59 2486.02,4609.55 P3.3
NO_OPEN_1: P1.1 U1.3 | length 1884.9
  Top Layer w100: P1.1 3565.16,4609.55 3483.23,4527.62 3483.23,4366.1 3565.16,4284.17 3565.16,4032.28 U1.3
  Bottom Layer w100: P1.1 3565.16,4609.55 3483.23,4527.62 3483.23,4366.1 3565.16,4284.17 3565.16,4032.28 U1.3
NO_OPEN_2: P3.1 U4.3 | length 1878.1
  Top Layer w100: P3.1 2886.02,4605.62 2810,4529.59 2810,4368.07 2886.02,4292.05 2886.02,4040.16 U4.3
  Bottom Layer w100: P3.1 2886.02,4605.62 2810,4529.59 2810,4368.07 2886.02,4292.05 2886.02,4040.16 U4.3
PDI_CLK: P5.5 U6.35 | length 1547.3
  Top Layer w15: U6.35 3554.13,3510.24 3856.24,3812.34 3856.24,4820.02 P5.5
PDI_DATA: P5.1 U6.34 | length 1847.3
  Top Layer w15: U6.34 3585.63,3473.42 v1@3675.69,3563.48 ; v1(3698.02,3721.64) 3826.24,3849.86 3826.24,4863.6 3886.72,4924.07 4056.24,4924.07 P5.1
  Bottom Layer w15: v1@3656.67,3544.46 3675.69,3563.48 3675.69,3570.38 3698.02,3592.7 v1(3698.02,3721.64)
  other v1: 3668.31,3556.1
REG1: P6.1 P6.2 U6.41 | length 1783.3
  Top Layer w15: U6.41 3363.66,3472.95 3363.66,3509 3358.27,3514.39 3358.27,3529.54 v1(3382.05,3553.32) ; v1(4124.02,2725.39) 4250.39,2725.39 P6.2 P6.1
  Bottom Layer w15: v1(3382.05,3553.32) 3384.2,3551.18 3437.01,3551.18 3518.37,3469.82 3879.03,3469.82 4124.02,3224.84 v1(4124.02,2725.39)
REG2: P6.3 P6.4 U6.42 | length 1964
  Top Layer w15: v1(3255.91,3563.98) 3290.35,3563.98 3311.83,3542.5 3311.83,3518.41 3333.66,3496.57 U6.42 ; v1(4064.96,2784.45) 4071.85,2777.56 4298.23,2777.56 P6.4 P6.3
  Bottom Layer w15: v1(3255.91,3563.98) 3229.82,3537.89 3229.82,3517.22 3243.37,3503.68 3396.64,3503.68 3398.75,3505.78 3464.7,3439.82 3828.88,3439.82 4009.98,3258.72 4047.71,3258.72 4060.89,3245.54 4060.89,2788.52 v1(4064.96,2784.45)
REG3: P6.5 P6.6 U6.43 | length 1564.7
  Top Layer w15: U6.43 3302.17,3424.51 3518.98,3207.7 3525.27,3207.7 3546.93,3186.04 3568.14,3186.04 3596.71,3157.47 3596.71,3072.1 3608.96,3059.86 3608.96,3030.81 3883.86,2755.91 3969.24,2755.91 4045.29,2831.95 4084.64,2831.95 4109.03,2807.56 4252.64,2807.56 P6.6 P6.5
REG4: P6.7 P6.8 U6.24 | length 796.8
  Top Layer w15: U6.24@3679.57,3124.46 3838.68,2965.35 P6.8 P6.7
REG5: P6.9 P6.10 U6.25 | length 798
  Top Layer w15: U6.25 3651.54,3153.58 3666.27,3153.58 3667.15,3154.46 3692,3154.46 3781.75,3064.7 4309.78,3064.7 P6.10 P6.9
REG6: P6.11 P6.12 U6.28 | length 819.2
  Top Layer w15: U6.28 3652.09,3247.52 3744.71,3247.52 3800.3,3191.93 4181.73,3191.93 4211.51,3221.71 4254.07,3221.71 P6.12 P6.11
REG7: P6.13 P6.14 U6.29 | length 798.8
  Top Layer w15: U6.29@3650.59,3279.51 3651.08,3279.02 3755.64,3279.02 3809.26,3225.39 3959.55,3225.39 3991.05,3256.89 4301.97,3256.89 P6.14 P6.13
REG8: P6.15 P6.16 U6.32 | length 764.3
  Top Layer w15: U6.32@3650.59,3376 4299.78,3376 P6.16 P6.15
REG9: P6.17 P6.18 U6.33 | length 784.2
  Top Layer w15: U6.33 3709.45,3465.35 P6.18 P6.17
SEN1: P4.2 U6.10 | length 866.1
  Top Layer w15: v1(3062.01,3014.76) 3169.27,3122.03 U6.10@3205.71,3122.03
  Bottom Layer w15: v1(3062.01,3014.76) 3142.07,2934.7 3142.07,2742.23 3341.93,2542.37 P4.2
SEN2: P7.2 U6.11 | length 1182
  Top Layer w15: v1(3080.71,2925.2) 3080.71,2966.29 3205.71,3091.29 U6.11
  Bottom Layer w15: v1(3080.71,2925.2) 2999.02,2843.5 2999.02,2485.63 P7.2
SEN3_A: P8.2 U6.4 | length 771.2
  Top Layer w15: U6.4 3264.76,3312.01 v1(3295.28,3342.52)
  Bottom Layer w15: v1(3295.28,3342.52) 3313.98,3342.52 3338.58,3317.91 3338.58,3219.49 3292.32,3173.23 3292.32,2865.55 P8.2
SEN3_B: P8.3 U6.5 | length 705.1
  Top Layer w15: U6.5 3277.88,3280.51 v1(3289.53,3268.86)
  Bottom Layer w15: P8.3 3251.24,2806.63 3251.24,2988.54 3197.83,3041.94 3197.83,3173.23 3244.09,3173.23 3289.37,3218.5 3289.37,3268.7 v1(3289.53,3268.86) v1@3294.09,3264.3
SW_2: C11.1 R14.1 SW2.2 U6.12 | length 643.7
  Top Layer w15: R14.1 R14.1@2913.39,2947.51 ; SW2.2@2988.02,2812.72 2977.35,2812.72 2947.7,2842.38 2927.3,2842.38 C11.1 2913.39,2870.08 R14.1@2913.39,2947.51 ; U6.12 3121.79,2877.7 2983.2,2877.7 R14.1@2913.39,2947.51
SW_PROGRAM: C10.1 R13.1 SW1.2 U6.13 | length 1524.6
  Top Layer w15: C10.1 2569.45,2867.13 ; SW1.2@2623.85,2454.72 2623.85,2812.72 2569.45,2867.13 ; v1(2909.45,3080.71) 2843.18,3080.71 2672.24,2909.77 R13.1 2635.83,2867.13 2569.45,2867.13 ; v1(3203.74,2875.98) 3299.21,2971.46 3302.17,2971.46 U6.13
  Bottom Layer w15: v1(2909.45,3080.71) 3063.24,3080.71 3172.07,2971.88 3172.07,2907.66 v1(3203.74,2875.98)
USB_DM: J1.2 U6.26 | length 1472.4
  Top Layer w10: 4242.13,2370.1 4244.63,2367.6 J1.2@4300.2,2367.6
  Top Layer w15: U6.26 3702.86,3186.02 3783.57,3105.32 4127.95,3105.32 4134.84,3112.2 v1(4187.99,3112.2) ; v1(4103.35,2590.55) 4136.67,2557.22 4136.67,2475.55 4242.13,2370.1
  Bottom Layer w15: v1(4103.35,2590.55) 4192.91,2680.12 v1@4192.91,3115.16
USB_DP: J1.3 U6.27 | length 1478.9
  Top Layer w10: v1(4184.26,2585.76) 4184.26,2484.02 4275.68,2392.6 J1.3@4300.2,2392.6
  Top Layer w15: U6.27 3713.79,3217.52 3735.92,3195.39 3754.41,3195.39 3808.07,3141.73 4121.94,3141.73 4122.42,3142.2 4150.82,3142.2 4168.32,3159.7 4191.93,3159.7 v1@4209.39,3177.17
  Bottom Layer w15: v1(4184.26,2585.76) 4244.09,2645.59 4244.09,3161.42 v1(4231.3,3174.21)
V_POWER: C1.2 C4.1 CP1.2 U2.3 U7.1 | length 2288.2
  Top Layer w20: C1.2 2825.2,1925.2 2790,1890 2790,1710 2812.99,1687.01 CP1.2 2967.01,1687.01 3020,1740 3020,1801.5 v1(3024.61,1806.1)
  Bottom Layer w20: U7.1 2742.13,1892.72 2742.13,1862.09 2798.11,1806.1 v1(3024.61,1806.1) 3242.76,2024.25 3510.6,2024.25 3560.39,2074.04 3560.39,2346.73 3717.6,2503.94 C4.1 3725.79,2511.22 U2.3@3725.79,2693.9
V_USB: C12.2 J1.1 P2.3 | length 234.4
  Top Layer w20: P2.3 4116.34,2323.82 C12.2 4247.05,2337.6 J1.1
pads on no net: CP1. CP1.3 J1.4 P5.3 P5.4 U5.3 U5.4 U5.5 U5.6 U5.7 U5.8 U5.9 U5.10 U5.11 U5.14 U5.15 U5.16 U5.17 U5.18 U5.19 U5.20 U5.23 U5.24 U5.25 U5.26 U5.27 U5.28 U5.29 U5.30 U5.33 U6.20

## Polygon pours and split planes (outlines as drawn)
GND on Top Layer "Top Layer-No Net" (solid, pour order 2): 2350,3770 3690,3770 3690,5000 4460,5000 4460,2050 3700,2050 3700,1320 2350,1320 2350,3770
GND on Bottom Layer "Top Layer-No Net" (solid, pour order 4): 3690,5000 4460,5000 4460,2050 3696.06,2050 3700,2046.06 3700,1320 2350,1320 2350,3770 3690,3770

## Silkscreen, mask and mechanical layers (free items; w line width, h text height)
Top Overlay:
  lines w10: 4150,2280 4160,2280 4160,2390 ; 4150,2390 4160,2390 ; 4150,2490 4160,2490 4160,2390
  text "PDI PROGRAMMER" at 3800,4930 h50
  text "OctopusBot" at 4320,4060 h120 r90
  text "DeepSea Developmentes" at 4380,4060 h60 r90
  text "JULY 2014. V3 REV A" at 4440,4060 h40 r90
  text "GND" at 4140,3740 h60
  text "Relay 2" at 2467.09,3642.36 h70
  text "Relay 1" at 3220,3640 h70
  text "5V" at 4160,3640 h60
  text "3.3V" at 4140,3540 h60
  text "LED 1" at 2704.72,3511.3 h60
  text "IO9" at 4180,3440 h50
  text "LED 2" at 2704.72,3413.08 h60
  text "LED 3" at 2704.72,3314.85 h60
  text "LED 4" at 2704.72,3216.62 h60
  text "LED 5" at 2704.72,3118.4 h60
  text "LED 6" at 2704.72,3020.17 h60
  text "Sensor 3" at 3143.7,2918.31 h50
  text "IO1" at 4180,2640 h50
  text "Sensor 2" at 3193.9,2587.6 h50
  text "PLUG" at 4190,2410 h30 r90
  text "Button 1" at 2440,2360 h60
  text "Button 2" at 2800,2360 h60
  text "BOOTLOADER" at 2420,2320 h40
  text "USB" at 4190,2310 h30 r90
  text "Sensor 1" at 3206.1,2270.08 h50
  text "BT 1" at 3570,2180 h30
  text "BT 2" at 3900,2180 h30
  text "Motor 2" at 2728.35,1896.65 h60 r90
  text "Motor 1" at 2738.19,1434.06 h60 r90
Bottom Overlay:
  text "http://deep-sea.co/" at 4405.51,4942.91 h60 r90
  text "DANIEL KURATOMI" at 4325.51,4932.91 h60 r90
Mechanical 1:
  lines w10: 4461.61,5000.98 2353.35,5000.98 2353.35,1319.88 4462.6,1319.88 4462.6,5001.97